# Altium PCB Copy of MT7688.PcbDoc
Units mil, origin at the board's own origin, x right, y up, seen from the top; angles counter-clockwise.
Board outline 3937.01 x 3937.01 mil, 4 copper layers (Top Layer, GND, Layer 3, Bottom Layer), stack 23.756 mil thick; 128 components, 123 nets, 502 pads, 1 vias.
Unrouted connection lines stored in the file: 341.
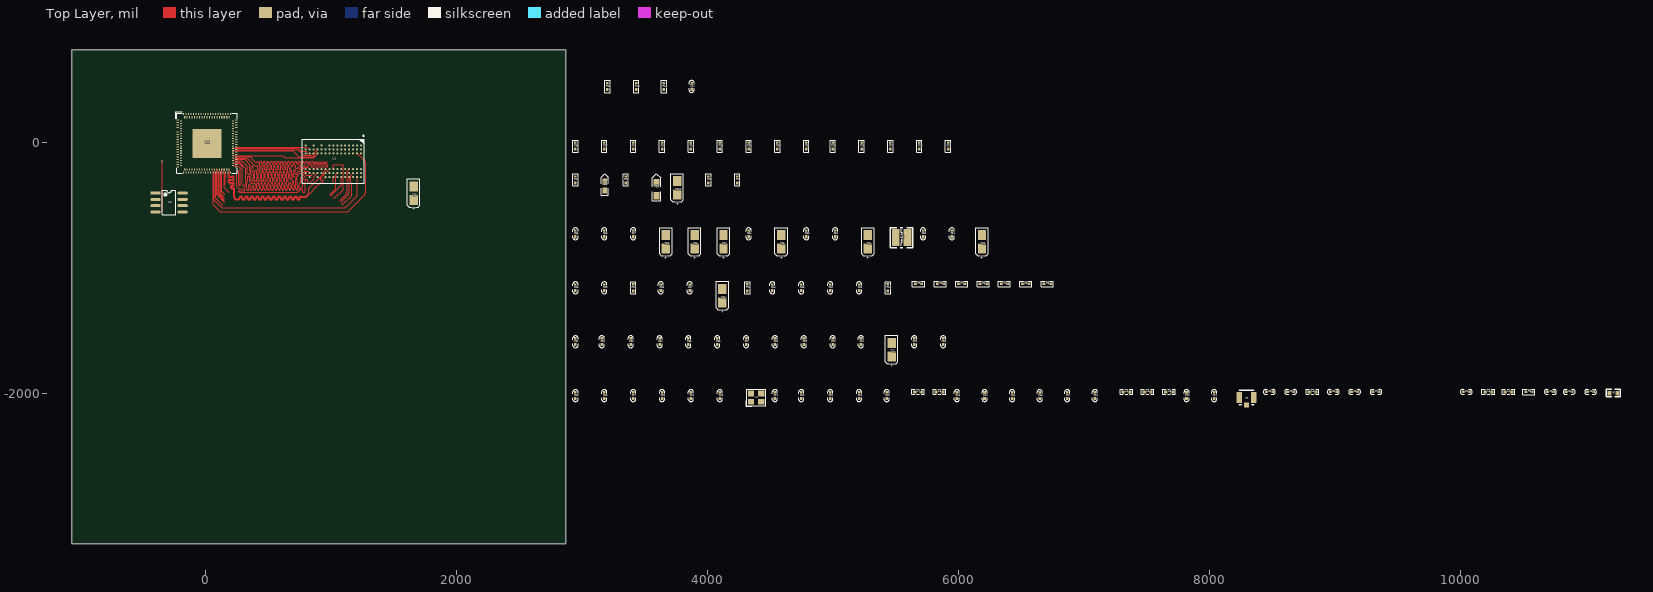
[diagram p0: Top Layer view]
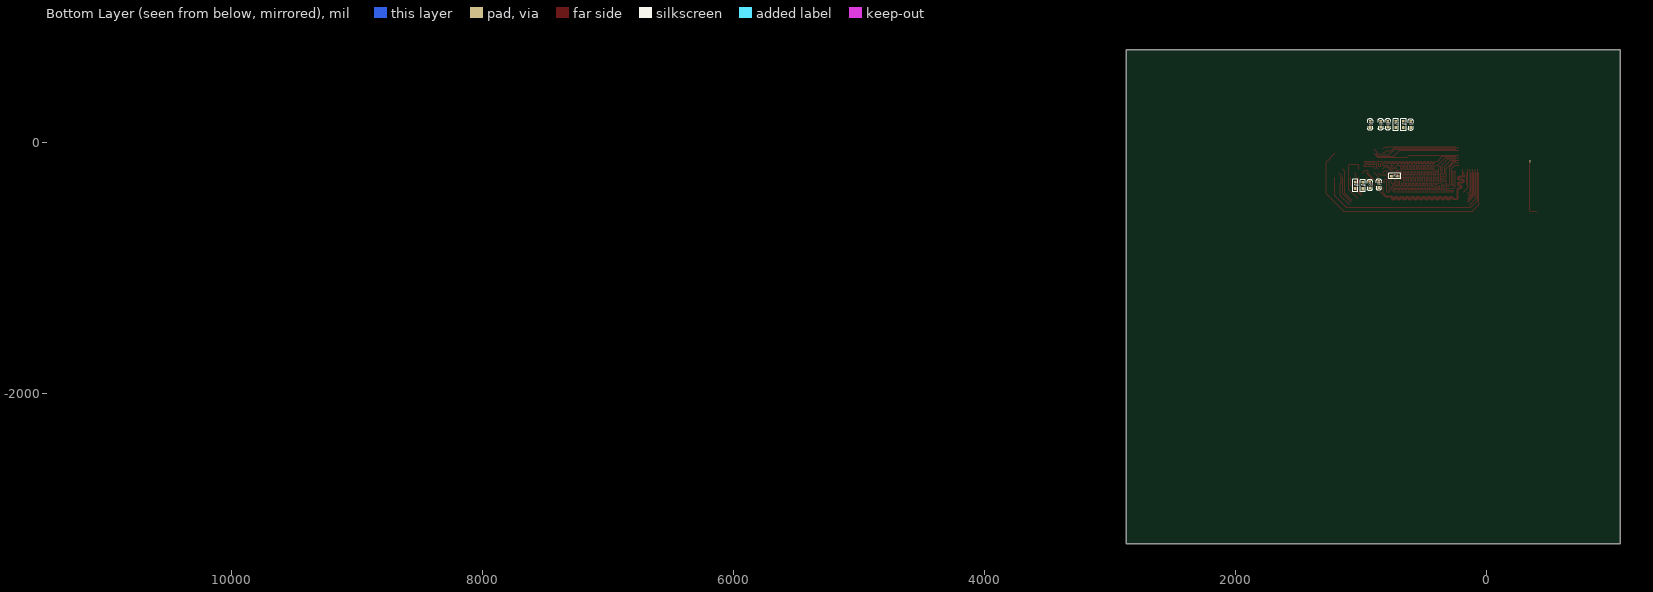
[diagram p1: Bottom Layer view, seen from below]

## Layer stack, top to bottom
Top Solder: solder mask 0.4, Solder Resist, Dk 3.5
Top Layer: signal copper 1.4
Dielectric 2: prepreg 2.8, PP-006, Dk 4.1
GND: signal copper 1.378
Dielectric 1: dielectric 12.6, FR-4, Dk 4.8
Layer 3: signal copper 1.378
Power: prepreg 2.8, PP-006, Dk 4.1
Bottom Layer: signal copper 1.4
Bottom Solder: solder mask 0.4, Solder Resist, Dk 3.5

## Board outline
-1069.88,-3198.88 2867.13,-3198.88 2867.13,738.13 -1069.88,738.13

## Design rules (kind name [scope] priority, off if disabled: settings)
Clearance DDR2 [InNetClass('DDR')] p1: gap=4 ignorepadtopadclearanceinfootprint=FALSE except(8: Arc-Arc Arc-Track Track-Track)
Clearance [All] p2: gap=6 ignorepadtopadclearanceinfootprint=FALSE except(4: Arc-Arc Arc-Track Arc-SMDPad Track-Track Track-SMDPad)
DiffPairsRouting [All] p1: maxlimit=16 minlimit=4 mostfreqgap=8 toplayer_prefgap=4 toplayer_minwidth=4 toplayer_maxwidth=8 toplayer_prefwidth=8 midlayer1_minwidth=4 midlayer1_maxwidth=8 midlayer1_prefwidth=8 midlayer2_mingap=8 midlayer2_minwidth=4 midlayer2_maxwidth=8 midlayer2_prefwidth=8 bottomlayer_minwidth=4 bottomlayer_maxwidth=8 bottomlayer_prefwidth=8 maxuncoupledlength=500
PolygonConnect [All] p1: connectstyle=Relief reliefconductorwidth=10 reliefentries=4 polygonreliefangle="90 Angle" airgapwidth=10
RoutingVias [All] p1: holewidth=9.84 width=17.72 viastyle="Through Hole" minholewidth=9.84 minwidth=17.72 maxholewidth=9.84 maxwidth=25.59
SilkToSolderMaskClearance [IsPad] p1: minsilkscreentomaskgap=5.91 clearancetoexposedcopper=TRUE
SolderMaskExpansion [IsVia] p1: expansion=4 istentingtop=TRUE
Width [All] p1: maxlimit=39.37 minlimit=4 preferedwidth=6
28 further rules are at their usual default settings.

## Classes and differential pairs
net class DDR: DDR_CASN DDR_CSN DDR_MBA0 DDR_MBA1 DDR_MBA2 DDR_MCKE DDR_MDQM0 DDR_MDQM1 DDR_MDQS0 DDR_MDQS1 DDR_MODT DDR_RASN DDR_VREF DDR_WEN MADDR0 MADDR1 MADDR2 MADDR3 MADDR4 MADDR5 MADDR6 MADDR7 MADDR8 MADDR9 MADDR10 MADDR11 MADDR12 MADDR13 MDATA0 MDATA1 MDATA2 MDATA3 MDATA4 MDATA5 MDATA6 MDATA7 MDATA8 MDATA9 MDATA10 MDATA11 MDATA12 MDATA13 MDATA14 MDATA15
component class Flash: C64 R18 R19 R20 U3
component class Designator: R25 R26 R27 R28 R29 R30 R31 R32 R33 R34 R35 R36 R37 R38
component class DDR: C58 C59 C60 C61 C62 C63 R13 R14 R15 R16 R17 TC9 U2
differential pair USB_D: +USB_D_P -USB_D_N
differential pair TXO1: +TXO1_P -TXO1_N
differential pair TXO0: +TXO0_P -TXO0_N
differential pair RXI1: +RXI1_P -RXI1_N
differential pair RXI0: +RXI0_P -RXI0_N
differential pair CLK: +CLK_P -CLK_N

## Components (designator, comment, footprint, x,y, rotation, side; value= is the part's Value field where it differs from the comment)
C1 "CAP" 0402C 10690.12,-1988.88 r0 top
C2 "CAP" 0402C 10840.12,-1988.88 r0 top
C3 "CAP" 0402C 11010.12,-1988.88 r0 top
C4 "CAP" 0402C 10020.12,-1988.88 r0 top
C5 "CAP" 0402C 8960.12,-1988.88 r0 top
C6 "CAP" 0402C 9130.12,-1988.88 r0 top
C7 "CAP" 0402C 9300.12,-1988.88 r0 top
C8 "CAP" 0402C 8450.12,-1988.88 r0 top
C9 "CAP" 0402C 8620.12,-1988.88 r0 top
C10 "CAP" 0402C 7815.12,-2043.88 r90 top
C11 "CAP" 0402C 8035.12,-2043.88 r90 top
C12 "CAP" 0402C 7085.12,-2043.88 r90 top
C13 "CAP" 0402C 5985.12,-2043.88 r90 top
C14 "CAP" 0402C 6205.12,-2043.88 r90 top
C15 "CAP" 0402C 6425.12,-2043.88 r90 top
C16 "CAP" 0402C 6645.12,-2043.88 r90 top
C17 "CAP" 0402C 6865.12,-2043.88 r90 top
C18 "CAP" 0402C 5205.12,-2043.88 r90 top
C19 "CAP" 0402C 5425.12,-2043.88 r90 top
C20 "CAP" 0402C 4975.12,-2043.88 r90 top
C21 "CAP" 0402C 4535.12,-2043.88 r90 top
C22 "CAP" 0402C 4745.12,-2043.88 r90 top
C23 "CAP" 0402C 4095.12,-2043.88 r90 top
C24 "CAP" 0402C 3865.12,-2043.88 r90 top
C25 "CAP" 0402C 3635.12,-2043.88 r90 top
C26 "CAP" 0402C 3175.12,-2043.88 r90 top
C27 "CAP" 0402C 3405.12,-2043.88 r90 top
C28 "CAP" 0402C 2945.12,-2043.88 r90 top
C29 "CAP" 0402C 5645.12,-1613.88 r90 top
C30 "CAP" 0402C 5875.12,-1613.88 r90 top
C31 "CAP" 0402C 2945.12,-1613.88 r90 top
C32 "CAP" 0402C 3155.12,-1613.88 r90 top
C33 "CAP" 0402C 3385.12,-1613.88 r90 top
C34 "CAP" 0402C 3615.12,-1613.88 r90 top
C35 "CAP" 0402C 3845.12,-1613.88 r90 top
C36 "CAP" 0402C 4075.12,-1613.88 r90 top
C37 "CAP" 0402C 4305.12,-1613.88 r90 top
C38 "CAP" 0402C 4535.12,-1613.88 r90 top
C39 "CAP" 0402C 4765.12,-1613.88 r90 top
C40 "CAP" 0402C 4995.12,-1613.88 r90 top
C41 "CAP" 0402C 5220.12,-1613.88 r90 top
C42 "CAP" 0402C 4975.12,-1183.88 r90 top
C43 "CAP" 0402C 5205.12,-1183.88 r90 top
C44 "CAP" 0402C 4515.12,-1183.88 r90 top
C45 "CAP" 0402C 4745.12,-1183.88 r90 top
C46 "CAP" 0402C 3625.12,-1183.88 r90 top
C47 "CAP" 0402C 3855.12,-1183.88 r90 top
C48 "CAP" 0402C 2945.12,-1183.88 r90 top
C49 "CAP" 0402C 3175.12,-1183.88 r90 top
C50 "0.1uF/16V" 0402C 5715.12,-753.88 r90 top
C51 "0.1uF/16V" 0402C 5945.12,-753.88 r90 top
C52 "0.1uF/16V" 0402C 5015.12,-753.88 r90 top
C53 "15pF/50V" 0402C 4785.12,-753.88 r90 top
C54 "15pF/50V" 0402C 4325.12,-753.88 r90 top
C55 "0.1uF/16V" 0402C 2945.12,-753.88 r90 top
C56 "0.1uF/16V" 0402C 3175.12,-753.88 r90 top
C57 "0.1uF/16V" 0402C 3405.12,-753.88 r90 top
C58 "0.1uF/16V" 0402C 601.53,167.03 r270 bottom
C59 "0.1uF/16V" 0402C 783.31,119.26 r90 bottom
C60 "0.1uF/16V" 0402C 924.06,118.02 r90 bottom
C61 "0.1uF/16V" 0402C 840.39,119.26 r90 bottom
C62 "0.1uF/16V" 0402C 855.63,-310.93 r270 bottom
C63 "0.1uF/16V" 0402C 926.5,-315.13 r270 bottom
C64 "0.1uF/16V" 0402C 3870.12,421.12 r90 top
D1 "LED" LED-0805B 3590.12,-423.88 r90 top
D2 "LED" LED-0603B 3180.12,-383.88 r90 top
L1 "INDUCTOR" 0402L 10195.12,-1988.88 r0 top
L2 "INDUCTOR" 0402L 10355.12,-1988.88 r0 top
L3 "INDUCTOR" 0402L 8795.12,-1988.88 r0 top
L4 "INDUCTOR" 0402L 7310.12,-1988.88 r0 top
L5 "INDUCTOR" 0402L 7480.12,-1988.88 r0 top
L6 "INDUCTOR" 0402L 7650.12,-1988.88 r0 top
L7 "INDUCTOR" 0402L 5650.12,-1988.88 r0 top
L8 "INDUCTOR" 0402L 5820.12,-1988.88 r0 top
L9 "INDUCTOR" CD31 5545.12,-758.88 r0 top
P1 "50OHM" IPEX 8235.12,-2033.88 r0 top
R1 "RES" 0603R 11185.12,-1998.88 r0 top
R2 "RES" 0402R 10520.12,-1988.88 r0 top
R3 "RES" 0402R 6680.12,-1128.88 r0 top
R4 "RES" 0402R 6340.12,-1128.88 r0 top
R5 "RES" 0402R 6510.12,-1128.88 r0 top
R6 "RES" 0402R 6170.12,-1128.88 r0 top
R7 "RES" 0402R 6000.12,-1128.88 r0 top
R8 "RES" 0402R 5830.12,-1128.88 r0 top
R9 "RES" 0402R 5655.12,-1128.88 r0 top
R10 "RES" 0402R 5435.12,-1183.88 r90 top
R11 "RES" 0402R 4315.12,-1183.88 r90 top
R12 "RES" 0402R 3405.12,-1183.88 r90 top
R13 "RES" 0402R 750.98,-268.76 r180 bottom
R14 "RES" 0402R 1041.5,-368.05 r90 bottom
R15 "RES" 0402R 983.43,-321.79 r270 bottom
R16 "RES" 0402R 658.03,165.82 r270 bottom
R17 "RES" 0402R 719.49,118.05 r90 bottom
R18 "RES" 0402R 3650.12,421.12 r90 top
R19 "RES" 0402R 3430.12,421.12 r90 top
R20 "RES" 0402R 3200.12,421.12 r90 top
R21 "RES" 0402R 4235.12,-323.88 r90 top
R22 "RES" 0402R 4005.12,-323.88 r90 top
R23 "RES" 0402R 3345.12,-323.88 r90 top
R24 "RES" 0402R 2945.12,-323.88 r90 top
R25 "RES" 0402R 5915.12,-53.88 r90 top
R26 "RES" 0402R 5685.12,-53.88 r90 top
R27 "RES" 0402R 5455.12,-53.88 r90 top
R28 "RES" 0402R 5225.12,-53.88 r90 top
R29 "RES" 0402R 4995.12,-53.88 r90 top
R30 "RES" 0402R 4555.12,-53.88 r90 top
R31 "RES" 0402R 4785.12,-53.88 r90 top
R32 "RES" 0402R 4325.12,-53.88 r90 top
R33 "RES" 0402R 4095.12,-53.88 r90 top
R34 "RES" 0402R 3865.12,-53.88 r90 top
R35 "RES" 0402R 3635.12,-53.88 r90 top
R36 "RES" 0402R 3405.12,-53.88 r90 top
R37 "RES" 0402R 3175.12,-53.88 r90 top
R38 "RES" 0402R 2945.12,-53.88 r90 top
TC1 "TCAP" TAJ-A/3216 5465.12,-1708.88 r90 top
TC2 "TCAP" TAJ-A/3216 4115.12,-1278.88 r90 top
TC3 "2.2uF/6.3V" TAJ-A/3216 6185.12,-848.88 r90 top
TC4 "10uF/6.3V" TAJ-A/3216 5275.12,-848.88 r90 top
TC5 "10uF/6.3V" TAJ-A/3216 4585.12,-848.88 r90 top
TC6 "2.2uF/6.3V" TAJ-A/3216 3895.12,-848.88 r90 top
TC7 "4.7uF/6.3V" TAJ-A/3216 4125.12,-848.88 r90 top
TC8 "4.7uF/6.3V" TAJ-A/3216 3665.12,-848.88 r90 top
TC9 "4.7uF/6.3V" TAJ-A/3216 1655.8,-462.05 r90 top
TC10 "4.7uF/6.3V" TAJ-A/3216 3755.12,-418.88 r90 top
U1 "MT7688AN" MT7628AN$2F$DRQFN156$2F$SMD$2F$P0.5$2F$12X12 7.87,-7.87 r270 top locked
U2 "DDR2_W9751G6KB" MICT-RT-84 1015.39,-150.79 r270 top locked
U3 "W25Q128" SOP8 -402.56,-404.98 r0 top
X1 "XTAL-4P" "OSC 3225-4P" 4385.12,-2033.88 r0 top

## Footprints (in the part's own frame and the unit in brackets; to place one, negate y for a bottom-side part, rotate by r counter-clockwise, add the part's x,y. Pads: shape width x height; smd on the part's side, far side on the other; paste and mask are expansions set on the pad)
0402C [mil]
  rect 25x20 smd: 1(2,0.16) 2(48,0.16)
  silkscreen extent -23,-20 73,20, body extent 5,-12 45,12, height 8
0402L [mil]
  rect 30x25 smd: 1(0,0) 2(50,0)
  silkscreen extent -25,-20 75,20, body extent 5,-10 45,10, height 20
0402R [mil]
  rect 26x20 smd: 1(0,0) 2(48,0)
  silkscreen extent -24,-21 72,21, body extent 4,-10 43,10, height 13
0603R [mm]
  rect 0.8x0.965 smd: 1(0,0) 2(1.6,0)
  silkscreen extent -0.64,-0.76 2.21,0.76, body extent -0.04,-0.41 1.56,0.41, height 0.45
CD31 [mm] "3.5*3*1mm（长宽高）"
  rect 1.6x3.5 smd: 1(-1.2,0) 2(1.2,0)
  silkscreen extent -2.29,-2.03 2.29,2.03, body extent -1.72,-1.48 1.72,1.52, height 1.2
IPEX [mm]
  rect 1.05x2.2 smd: 1(0,0) 3(2.95,0)
  rect 1x1.05 smd: 2(1.475,-1.525)
  silkscreen extent -0.02,-1.5 2.98,1.5, body extent 0.02,-1.55 3.02,1.55, height 1.25
LED-0603B [mil]
  rect 50x35 smd: A(0,0.26) K(70,0.26)
  silkscreen extent -36,-28 135,28, body extent 4,-15 66,17, height 24
LED-0805B [mil]
  rect 60x50 smd: A(0,0) K(100,0)
  silkscreen extent -40,-35 175,35, body extent 10,-25 89,25, height 32
MICT-RT-84 [mm] "BGA, 84-Balls, Body 12.5x9mm, Pitch 0.8mm"
  round 0.4 smd: A1(-3.2,5.6) A2(-2.4,5.6) A3(-1.6,5.6) A7(1.6,5.6) A8(2.4,5.6) A9(3.2,5.6) B1(-3.2,4.8) B2(-2.4,4.8) B3(-1.6,4.8) B7(1.6,4.8) B8(2.4,4.8) B9(3.2,4.8) C1(-3.2,4) C2(-2.4,4) C3(-1.6,4) C7(1.6,4) C8(2.4,4) C9(3.2,4) D1(-3.2,3.2) D2(-2.4,3.2) D3(-1.6,3.2) D7(1.6,3.2) D8(2.4,3.2) D9(3.2,3.2) E1(-3.2,2.4) E2(-2.4,2.4) E3(-1.6,2.4) E7(1.6,2.4) E8(2.4,2.4) E9(3.2,2.4) F1(-3.2,1.6) F2(-2.4,1.6) F3(-1.6,1.6) F7(1.6,1.6) F8(2.4,1.6) F9(3.2,1.6) G1(-3.2,0.8) G2(-2.4,0.8) G3(-1.6,0.8) G7(1.6,0.8) G8(2.4,0.8) G9(3.2,0.8) H1(-3.2,0) H2(-2.4,0) H3(-1.6,0) H7(1.6,0) H8(2.4,0) H9(3.2,0) J1(-3.2,-0.8) J2(-2.4,-0.8) J3(-1.6,-0.8) J7(1.6,-0.8) J8(2.4,-0.8) J9(3.2,-0.8) K2(-2.4,-1.6) K3(-1.6,-1.6) K7(1.6,-1.6) K8(2.4,-1.6) K9(3.2,-1.6) L1(-3.2,-2.4) L2(-2.4,-2.4) L3(-1.6,-2.4) L7(1.6,-2.4) L8(2.4,-2.4) M2(-2.4,-3.2) M3(-1.6,-3.2) M7(1.6,-3.2) M8(2.4,-3.2) M9(3.2,-3.2) N1(-3.2,-4) N2(-2.4,-4) N3(-1.6,-4) N7(1.6,-4) N8(2.4,-4) P2(-2.4,-4.8) P3(-1.6,-4.8) P7(1.6,-4.8) P8(2.4,-4.8) P9(3.2,-4.8) R1(-3.2,-5.6) R2(-2.4,-5.6) R3(-1.6,-5.6) R7(1.6,-5.6) R8(2.4,-5.6)
  silkscreen extent -5.27,-6.25 4.5,6.25, body extent -4.5,-6.25 4.5,6.25, height 1.2
MT7628AN$2F$DRQFN156$2F$SMD$2F$P0.5$2F$12X12 [mm]
  rect 0.19x0.45 smd: 1(-4.75,-5.925) 3(-4.25,-5.925) 5(-3.75,-5.925) 7(-3.25,-5.925) 9(-2.75,-5.925) 11(-2.25,-5.925) 13(-1.75,-5.925) 15(-1.25,-5.925) 17(-0.75,-5.925) 19(-0.25,-5.925) 21(0.25,-5.925) 23(0.75,-5.925) 25(1.25,-5.925) 27(1.75,-5.925) 29(2.25,-5.925) 31(2.75,-5.925) 33(3.25,-5.925) 35(3.75,-5.925) 37(4.25,-5.925) 39(4.75,-5.925) 79(4.75,5.925) 81(4.25,5.925) 83(3.75,5.925) 85(3.25,5.925) 87(2.75,5.925) 89(2.25,5.925) 91(1.75,5.925) 93(1.25,5.925) 95(0.75,5.925) 97(0.25,5.925) 99(-0.25,5.925) 101(-0.75,5.925) 103(-1.25,5.925) 105(-1.75,5.925) 107(-2.25,5.925) 109(-2.75,5.925) 111(-3.25,5.925) 113(-3.75,5.925) 115(-4.25,5.925) 117(-4.75,5.925)
  rect 0.22x0.45 smd: 2(-4.5,-5.275) 4(-4,-5.275) 6(-3.5,-5.275) 8(-3,-5.275) 10(-2.5,-5.275) 12(-2,-5.275) 14(-1.5,-5.275) 16(-1,-5.275) 18(-0.5,-5.275) 20(0,-5.275) 22(0.5,-5.275) 24(1,-5.275) 26(1.5,-5.275) 28(2,-5.275) 30(2.5,-5.275) 32(3,-5.275) 34(3.5,-5.275) 36(4,-5.275) 38(4.5,-5.275) 80(4.5,5.275) 82(4,5.275) 84(3.5,5.275) 86(3,5.275) 88(2.5,5.275) 90(2,5.275) 92(1.5,5.275) 94(1,5.275) 96(0.5,5.275) 98(0,5.275) 100(-0.5,5.275) 102(-1,5.275) 104(-1.5,5.275) 106(-2,5.275) 108(-2.5,5.275) 110(-3,5.275) 112(-3.5,5.275) 114(-4,5.275) 116(-4.5,5.275)
  rect 0.45x0.19 smd: 40(5.925,-4.75) 42(5.925,-4.25) 44(5.925,-3.75) 46(5.925,-3.25) 48(5.925,-2.75) 50(5.925,-2.25) 52(5.925,-1.75) 54(5.925,-1.25) 56(5.925,-0.75) 58(5.925,-0.25) 60(5.925,0.25) 62(5.925,0.75) 64(5.925,1.25) 66(5.925,1.75) 68(5.925,2.25) 70(5.925,2.75) 72(5.925,3.25) 74(5.925,3.75) 76(5.925,4.25) 78(5.925,4.75) 118(-5.925,4.75) 120(-5.925,4.25) 122(-5.925,3.75) 124(-5.925,3.25) 126(-5.925,2.75) 128(-5.925,2.25) 130(-5.925,1.75) 132(-5.925,1.25) 134(-5.925,0.75) 136(-5.925,0.25) 138(-5.925,-0.25) 140(-5.925,-0.75) 142(-5.925,-1.25) 144(-5.925,-1.75) 146(-5.925,-2.25) 148(-5.925,-2.75) 150(-5.925,-3.25) 152(-5.925,-3.75) 154(-5.925,-4.25) 156(-5.925,-4.75)
  rect 0.45x0.22 smd: 41(5.275,-4.5) 43(5.275,-4) 45(5.275,-3.5) 47(5.275,-3) 49(5.275,-2.5) 51(5.275,-2) 53(5.275,-1.5) 55(5.275,-1) 57(5.275,-0.5) 59(5.275,0) 61(5.275,0.5) 63(5.275,1) 65(5.275,1.5) 67(5.275,2) 69(5.275,2.5) 71(5.275,3) 73(5.275,3.5) 75(5.275,4) 77(5.275,4.5) 119(-5.275,4.5) 121(-5.275,4) 123(-5.275,3.5) 125(-5.275,3) 127(-5.275,2.5) 129(-5.275,2) 131(-5.275,1.5) 133(-5.275,1) 135(-5.275,0.5) 137(-5.275,0) 139(-5.275,-0.5) 141(-5.275,-1) 143(-5.275,-1.5) 145(-5.275,-2) 147(-5.275,-2.5) 149(-5.275,-3) 151(-5.275,-3.5) 153(-5.275,-4) 155(-5.275,-4.5)
  rect 5.9x5.9 smd: 157(0,0)
  silkscreen extent -6.35,-6.35 6.1,6.1
"OSC 3225-4P" [mm]
  rect 1.3x1.2 smd: 1(-1.05,-0.85) 2(1.05,-0.85) 3(1.05,0.85) 4(-1.05,0.85)
  silkscreen extent -2.03,-1.75 1.91,1.65, body extent -1.47,-1.27 1.73,1.23, height 0.7
SOP8 [mm]
  rect 2.1x0.6 smd: 1(0,0)
  oval 2.1x0.6 smd: 2(0,-1.27) 3(0,-2.54) 4(0,-3.81) 5(5.5,-3.81) 6(5.5,-2.54) 7(5.5,-1.27) 8(5.5,0)
  silkscreen extent 1.35,-4.41 4.15,0.6, body extent -0.36,-4.37 5.64,0.63, height 1.9
TAJ-A/3216 [mm]
  rect 2x1.7 smd: 1(0.047,0) 2(2.794,0)
  silkscreen extent -1.4,-1.27 4.32,1.27, body extent -0.2,-0.8 3,0.8, height 1.6

## Part data
C1 C2 C3 C4 C5 C6 C7 C8 C9 C10 C11 C12 C13 C14 C15 C16 C17 C18 C19 C20 C21 C22 C23 C24 C25 C26 C27 C28 C29 C30 C31 C32 C33 C34 C35 C36 C37 C38 C39 C40 C41 C42 C43 C44 C45 C46 C47 C48 C49: "无极性电容"
C50 C51 C52 C53 C54 C55 C56 C57 C58 C59 C60 C61 C62 C63 C64: library part CAP, "无极性电容"
P1: library part IPEX, "RF Coaxial PCB Connector, MCX; Thru-Hole, Right-Angle Mount Socket, Blunt Post Terminal, 50 Ohm Impedance", PackageDocument=04-Jul-1999, ComponentLink1Description="Manufacturer Link", ComponentLink1URL=http://www.amphenolrf.com/, DatasheetDocument=30-May-2003, DrillSize="Corresponds to nominal value.", LatestRevisionDate=15-Jul-2004, LatestRevisionNote="Component Replaced.", PackageReference=919-119J-51AX, PCB_Layout="Complies with manufacturer's recommendation.", Published=15-Jul-2004, Publisher="Altium Limited"
TC1 TC2: "钽电容"
TC3 TC4 TC5 TC6 TC7 TC8 TC9 TC10: library part TCAP, "钽电容"
X1: "4脚无源晶振"

## Via types
v1: diameter 17.72, hole 9.84, Top Layer to Bottom Layer, tented both sides, 1 vias

## Nets (pads, with @x,y where several pads share a name; then routed paths per layer and width w, separated by ;. In a path a pad name is that pad's centre, name@x,y a point inside that pad or via, vN(x,y) a via of type N, cw(c..) or ccw(c..) an arc to the next point about the centre after c; other vN are vias at no path point)
3.3V_RF: C4.1 C5.2 C6.2 C7.2 C8.2 C9.2 C21.2 C22.2 C24.1 C25.1 C26.1 C27.1 L1.2 L2.2 R1.2 R2.1 U1.8 U1.14 U1.15 U1.149 U1.150 U1.155
3.3VD: C1.2 C2.2 C3.2 C44.1 C45.1 C46.1 C47.1 C49.1 C50.1 C51.1 R1.1 R4.2 R5.2 R21.1 R23.2 R24.2 R25.1 R27.1 R29.1 R30.1 R33.1 R35.1 R37.1 TC2.1 TC3.1 TC5.1 U1.23 U1.32 U1.38 U1.41 U1.53 U1.60 U1.117 U1.123 U1.124 U1.134 U1.146
CLK: R3.2 R27.2 R28.2 U3.6
CLK_N: R13.2 U1.76 U2.K8 | length 1517.6
  Top Layer w4: U1.76 175.58,-241.52 cw(c172.75,-244.35) 176.75,-244.35 176.75,-254.24 cw(c172.75,-254.24) 175.58,-257.07 169.2,-263.45 169.2,-274.15 174,-278.95 211.05,-278.95 cw(c211.05,-286.6) 218.7,-286.6 218.7,-287.3 cw(c211.65,-287.3) 211.65,-294.35 189.6,-294.35 ccw(c189.6,-308.9) 175.05,-308.9 ccw(c190.8,-308.9) 190.8,-324.65 212.45,-324.65 cw(c212.45,-330.95) 218.75,-330.95 218.75,-332.4 cw(c211.09,-332.4) 211.09,-340.06 205.64,-340.06 ccw(c205.64,-353.75) 191.95,-353.75 191.95,-355.15 ccw(c206.66,-355.15) 206.66,-369.86 214.16,-369.86 cw(c214.16,-377.38) 221.68,-377.38 221.68,-437.63 ccw(c240.8,-437.63) 240.8,-456.75 259.05,-456.75 ccw(c259.05,-444.7) 271.1,-444.7 cw(c278.05,-444.7) 285,-444.7 ccw(c299.95,-444.7) 314.9,-444.7 cw(c321.85,-444.7) 328.8,-444.7 ccw(c343.75,-444.7) 358.7,-444.7 cw(c365.65,-444.7) 372.6,-444.7 ccw(c387.55,-444.7) 402.5,-444.7 cw(c409.45,-444.7) 416.4,-444.7 ccw(c431.35,-444.7) 446.3,-444.7 cw(c453.25,-444.7) 460.2,-444.7 ccw(c475.15,-444.7) 490.1,-444.7 cw(c497.05,-444.7) 504,-444.7 ccw(c518.95,-444.7) 533.9,-444.7 cw(c540.85,-444.7) 547.8,-444.7 ccw(c562.75,-444.7) 577.7,-444.7 cw(c584.65,-444.7) 591.6,-444.7 ccw(c606.55,-444.7) 621.5,-444.7 cw(c628.45,-444.7) 635.4,-444.7 ccw(c650.35,-444.7) 665.3,-444.7 cw(c672.25,-444.7) 679.2,-444.7 ccw(c694.15,-444.7) 709.1,-444.7 cw(c716.05,-444.7) 723,-444.7 ccw(c737.95,-444.7) 752.41,-448.51 752.41,-440.8 cw(c756.41,-440.8) 756.44,-436.8 797.09,-436.8 ccw(c797.09,-432.8) 799.92,-435.63 911.93,-323.62 cw(c916.01,-327.75) 916.01,-321.94 931.35,-321.94 ccw(c931.35,-317.94) 935.35,-317.94 935.35,-306.33 ccw(c931.35,-306.3) 931.35,-302.3 918.65,-302.3 cw(c918.65,-298.3) 914.65,-298.3 914.65,-285.21 cw(c918.65,-285.21) 915.82,-282.38 951.48,-246.72 ccw(c948.65,-243.9) 952.26,-245.61 U2.K8
CLK_P: R13.1 U1.77 U2.J8 | length 1531.6
  Top Layer w4: U1.77 185.04,-229.11 ccw(c189.04,-229.11) 185.05,-229.4 185.13,-230.49 cw(c181.14,-230.8) 185.14,-230.8 185.14,-255.9 184.95,-256.1 184.95,-263.9 ccw(c192,-263.9) 192,-270.95 211.05,-270.95 cw(c211.05,-286.6) 226.7,-286.6 226.7,-287.3 cw(c211.65,-287.3) 211.65,-302.35 189.6,-302.35 ccw(c189.6,-308.9) 183.05,-308.9 ccw(c190.8,-308.9) 190.8,-316.65 212.45,-316.65 cw(c212.45,-330.95) 226.75,-330.95 226.75,-332.4 cw(c211.09,-332.4) 211.09,-348.06 205.64,-348.06 ccw(c205.64,-353.75) 199.95,-353.75 199.95,-355.15 ccw(c206.66,-355.15) 206.66,-361.86 214.16,-361.86 cw(c214.16,-377.5) 229.8,-377.5 229.8,-437.75 ccw(c240.8,-437.75) 240.8,-448.75 259.05,-448.75 ccw(c259.05,-444.7) 263.1,-444.7 cw(c278.05,-444.7) 293,-444.7 ccw(c299.95,-444.7) 306.9,-444.7 cw(c321.85,-444.7) 336.8,-444.7 ccw(c343.75,-444.7) 350.7,-444.7 cw(c365.65,-444.7) 380.6,-444.7 ccw(c387.55,-444.7) 394.5,-444.7 cw(c409.45,-444.7) 424.4,-444.7 ccw(c431.35,-444.7) 438.3,-444.7 cw(c453.25,-444.7) 468.2,-444.7 ccw(c475.15,-444.7) 482.1,-444.7 cw(c497.05,-444.7) 512,-444.7 ccw(c518.95,-444.7) 525.9,-444.7 cw(c540.85,-444.7) 555.8,-444.7 ccw(c562.75,-444.7) 569.7,-444.7 cw(c584.65,-444.7) 599.6,-444.7 ccw(c606.55,-444.7) 613.5,-444.7 cw(c628.45,-444.7) 643.4,-444.7 ccw(c650.35,-444.7) 657.3,-444.7 cw(c672.25,-444.7) 687.2,-444.7 ccw(c694.15,-444.7) 701.1,-444.7 cw(c716.05,-444.7) 731,-444.7 ccw(c737.95,-444.7) 744.41,-447.27 744.41,-437.23 744.41,-437.18 cw(c752.4,-437.19) 746.74,-431.55 cw(c753.36,-438.15) 753.35,-428.8 790.74,-428.8 ccw(c790.74,-424.8) 793.57,-427.63 817.08,-404.12 ccw(c814.25,-401.29) 818.25,-401.29 818.25,-369.77 cw(c822.25,-369.77) 819.42,-366.94 936.83,-249.54 ccw(c934,-246.71) 938,-246.71 938,-232.05 942,-228.05 967.14,-228.05 cw(c967.14,-232.05) 969.99,-229.24 982.71,-241.96 cw(c979.9,-244.8) 983.9,-244.8 U2.J8
CPURST_N: R22.2 U1.138
CS0: R18.2 U1.28 U3.1
DDR_1V8: C52.1 C53.2 C54.1 C55.1 C56.1 C57.1 C58.1 C60.1 C61.1 C62.1 C63.1 L9.2 R14.1 R16.1 TC4.1 TC8.1 TC9.1 U1.22 U1.58 U1.89 U1.91 U1.122 U1.145 U2.A1 U2.A9 U2.C1 U2.C3 U2.C7 U2.C9 U2.E1 U2.E9 U2.G1 U2.G3 U2.G7 U2.G9 U2.J1 U2.J9 U2.M9 U2.R1
DDR_CASN: U1.75 U2.L7
DDR_CSN: U1.78 U2.L8
DDR_IO_1V8: TC6.1 TC7.1 U1.79 U1.98 U1.116 U1.125
DDR_IO_1V8_MT7688: C31.1 C32.1 C33.1 C34.1 C35.1 C36.1 C37.1 C38.1 C39.1 C40.1 C41.1 TC1.1
DDR_MBA0: U1.100 U2.L2
DDR_MBA1: U1.99 U2.L3
DDR_MBA2: U1.101 U2.L1
DDR_MCKE: U1.103 U2.K2
DDR_MDQM0: U1.108 U2.F3
DDR_MDQM1: U1.64 U2.B3 | length 1905.3
  Top Layer w4: U1.64 57.09,-495.18 ccw(c61.09,-495.18) 58.26,-498.01 110.68,-550.43 ; 110.7,-550.45 ccw(c113.51,-547.6) 113.51,-551.6 1132.57,-551.6 ccw(c1132.54,-547.6) 1135.37,-550.43 1274.4,-411.4 1274.4,-157.83 U2.B3@1204.75,-88.18
DDR_MDQS0: U1.113 U2.F7
DDR_MDQS1: U1.72 U2.B7
DDR_MODT: R14.2 R15.1 U1.74 U2.K9 | length 110.1
  Top Layer w4: 155.51,-338.16 U1.74 ; 949.62,-289.53 952.28,-278.6 ccw(c948.4,-277.63) 952.4,-277.7 U2.K9
DDR_RASN: U1.81 U2.K7
DDR_VREF: C29.1 C30.1 C58.2 C59.1 R16.2 R17.1 U1.90 U1.104 U2.J2
DDR_WEN: U1.102 U2.K3
EPH_LED0_N: U1.143
EPH_LED1_N: U1.142
Flash_3V3: C64.1 R18.1 R19.1 R20.2 U3.8
GN1: C1.1 C2.1 C3.1 C4.2 C5.1 C6.1 C7.1 C8.1 C9.1 C12.1 C13.1 C14.1 C15.2 C18.2 C19.2 C20.2 C21.1 C22.1 C23.1 C24.2 C25.2 C26.2 C27.2 C28.2 C29.2 C30.2 C31.2 C32.2 C33.2 C34.2 C35.2 C36.2 C37.2 C38.2 C39.2 C40.2 C41.2 C42.2 C43.2 C44.2 C45.2 C46.2 C47.2 C48.2 C49.2 C50.2 C51.2 C52.2 C53.1 C54.2 C55.2 C56.2 C57.2 D2.K L3.2 P1.1 P1.3 R6.1 R9.1 R10.1 R11.1 R12.1 R26.1 R28.1 R31.1 R32.1 R34.1 R36.1 R38.1 TC1.2 TC2.2 TC3.2 TC4.2 TC5.2 TC6.2 TC7.2 TC8.2 TC10.2 U1.1 U1.2 U1.7 U1.10 U1.13 U1.63 U1.115 U1.120 U1.121 U1.128 U1.152 U1.156 U1.157 X1.1 X1.2 X1.4
GND: C59.2 C60.2 C61.2 C62.2 C63.2 C64.2 R15.2 R17.2 TC9.2 U2.A3 U2.A7 U2.B2 U2.B8 U2.D2 U2.D8 U2.E3 U2.E7 U2.F2 U2.F8 U2.H2 U2.H8 U2.J3 U2.J7 U2.N1 U2.P9 U3.4 | length 450.9
  Top Layer w6: U3.4 -359.88,-554.98 -349.88,-544.98 v1(-349.88,-150.88)
GPIO_0: U1.29
I2C_SCLK: R5.1 U1.20
I2C_SD: R4.1 U1.21
I2S_CLK: U1.19
I2S_DI: U1.16
I2S_DO: R37.2 R38.2 U1.17
I2S_WS: U1.18
MADDR0: U1.80 U2.M8 | length 1450.9
  Top Layer w4: U1.80 252.79,-185.04 272.78,-205.03 cw(c269.95,-207.86) 273.95,-207.83 273.95,-343.79 cw(c269.95,-343.79) 267.12,-346.62 260.57,-340.07 cw(c263.4,-337.24) 259.4,-337.24 259.4,-232.43 ccw(c255.4,-232.4) 255.4,-228.4 248.55,-228.4 ccw(c248.55,-232.4) 244.55,-232.4 244.55,-348.19 ccw(c248.55,-348.19) 245.72,-351.02 262.85,-368.15 310.8,-368.15 313.15,-370.5 313.15,-381.2 310.55,-383.8 261.79,-383.8 259.45,-386.14 259.45,-395.55 263.6,-399.7 727.39,-399.7 ccw(c727.39,-395.7) 730.22,-398.53 748.74,-380.01 ccw(c745.92,-377.18) 749.52,-378.92 749.85,-378.24 cw(c753.85,-378.2) 749.88,-377.69 cw(c753.85,-378.2) 753.88,-374.2 768.55,-374.2 cw(c768.55,-378.2) 772.55,-378.2 772.55,-394.85 ccw(c776.55,-394.85) 776.55,-398.85 786.85,-398.85 ccw(c786.85,-394.85) 790.85,-394.85 790.85,-298.9 cw(c794.85,-298.9) 794.85,-294.9 806.3,-294.9 cw(c806.3,-298.9) 810.3,-298.9 810.3,-316.9 ccw(c814.3,-316.9) 814.3,-320.9 829.34,-320.9 ccw(c829.34,-316.9) 832.17,-319.73 857.33,-294.57 ccw(c854.5,-291.74) 858.5,-291.74 858.5,-274.55 888.7,-244.35 U2.M8@889.7,-244.35
MADDR1: U1.88 U2.M3 | length 700.3
  Top Layer w4: U1.88 614.85,-106.3 633.2,-124.65 858.73,-124.65 880.79,-102.59 880.79,-98.8 889.41,-90.18 U2.M3
MADDR2: U1.87 U2.M7 | length 1450.6
  Top Layer w4: U1.87 353.1,-116.14 389.96,-153 392.1,-153 408.1,-153 cw(c408.1,-160) 415.1,-160 415.1,-165.61 ccw(c422.1,-165.61) 429.1,-165.61 429.1,-159.44 cw(c436.1,-159.44) 443.1,-159.44 443.1,-165.61 ccw(c450.1,-165.61) 457.1,-165.61 457.1,-159.44 cw(c464.1,-159.44) 471.1,-159.44 471.1,-165.61 ccw(c478.1,-165.61) 485.1,-165.61 485.1,-159.44 cw(c492.1,-159.44) 499.1,-159.44 499.1,-165.61 ccw(c506.1,-165.61) 513.1,-165.61 513.1,-159.44 cw(c520.1,-159.44) 527.1,-159.44 527.1,-165.61 ccw(c534.1,-165.61) 541.1,-165.61 541.1,-159.44 cw(c548.1,-159.44) 555.1,-159.44 555.1,-165.61 ccw(c562.1,-165.61) 569.1,-165.61 569.1,-159.44 cw(c576.1,-159.44) 583.1,-159.44 583.1,-165.61 ccw(c590.1,-165.61) 597.1,-165.61 597.1,-159.44 cw(c604.1,-159.44) 611.1,-159.44 611.1,-165.61 ccw(c618.1,-165.61) 625.1,-165.61 625.1,-159.44 cw(c632.1,-159.44) 639.1,-159.44 639.1,-165.61 ccw(c646.1,-165.61) 653.1,-165.61 653.1,-159.44 cw(c660.1,-159.44) 667.1,-159.44 667.1,-165.61 ccw(c674.1,-165.61) 681.1,-165.61 681.1,-159.44 cw(c688.1,-159.44) 695.1,-159.44 695.1,-165.61 ccw(c702.1,-165.61) 709.1,-165.61 709.1,-159.44 cw(c716.1,-159.44) 723.1,-159.44 723.1,-165.61 ccw(c730.1,-165.61) 737.1,-165.61 737.1,-159.44 cw(c744.1,-159.44) 751.1,-159.44 751.1,-165.61 ccw(c758.1,-165.61) 765.1,-165.61 765.1,-159.44 cw(c772.1,-159.44) 779.1,-159.44 779.1,-162.82 ccw(c786.1,-162.82) 793.1,-162.82 793.1,-159.44 cw(c800.1,-159.44) 807.1,-159.44 807.1,-160 ccw(c814.1,-160) 821.1,-160 cw(c828.1,-160) 828.1,-153 837.45,-153 963.46,-153 965.8,-155.34 965.8,-164.16 963.46,-166.5 886.59,-166.5 884.25,-168.84 884.25,-177.56 886.59,-179.9 969.19,-179.9 971.53,-182.24 971.53,-191.01 969.19,-193.35 892.03,-193.35 887.42,-197.96 887.42,-211.8 U2.M7
MADDR3: U1.97 U2.N2
MADDR4: U1.82 U2.N8 | length 1449.5
  Top Layer w4: U1.82 259.98,-165.35 272.29,-177.66 ; 272.35,-177.6 287.85,-193.1 287.85,-338.95 296.24,-347.34 300.29,-351.39 ccw(c305.24,-346.44) 312.24,-346.44 312.24,-334 cw(c319.24,-334) 326.24,-334 326.24,-374.46 ccw(c333.24,-374.46) 340.24,-374.46 340.24,-343.39 cw(c347.24,-343.39) 354.24,-343.39 354.24,-374.46 ccw(c361.24,-374.46) 368.24,-374.46 368.24,-351.52 cw(c375.24,-351.52) 382.24,-351.52 382.24,-374.46 ccw(c389.24,-374.46) 396.24,-374.46 396.24,-361.4 cw(c403.24,-361.4) 410.24,-361.4 410.24,-374.46 ccw(c417.24,-374.46) 424.24,-374.46 424.24,-368.79 cw(c431.24,-368.79) 438.24,-368.79 438.24,-374.46 ccw(c445.24,-374.46) 452.24,-374.46 452.24,-368.79 cw(c459.24,-368.79) 466.24,-368.79 466.24,-374.46 ccw(c473.24,-374.46) 480.24,-374.46 480.24,-368.79 cw(c487.24,-368.79) 494.24,-368.79 494.24,-374.46 ccw(c501.24,-374.46) 508.24,-374.46 508.24,-368.79 cw(c515.24,-368.79) 522.24,-368.79 522.24,-374.46 ccw(c529.24,-374.46) 536.24,-374.46 536.24,-368.79 cw(c543.24,-368.79) 550.24,-368.79 550.24,-374.46 ccw(c557.24,-374.46) 564.24,-374.46 564.24,-368.79 cw(c571.24,-368.79) 578.24,-368.79 578.24,-374.46 ccw(c585.24,-374.46) 592.24,-374.46 592.24,-368.79 cw(c599.24,-368.79) 606.24,-368.79 606.24,-374.46 ccw(c613.24,-374.46) 620.24,-374.46 620.24,-368.79 cw(c627.24,-368.79) 634.24,-368.79 634.24,-374.46 ccw(c641.24,-374.46) 648.24,-374.46 648.24,-368.79 cw(c655.24,-368.79) 662.24,-368.79 662.24,-374.46 ccw(c669.24,-374.46) 676.24,-374.46 676.24,-368.79 cw(c683.24,-368.79) 690.24,-368.79 690.24,-374.46 ccw(c697.24,-374.46) 704.24,-374.46 704.24,-368.79 cw(c711.24,-368.79) 718.24,-368.79 718.24,-373.63 ccw(c725.24,-373.63) 732.24,-373.63 732.24,-368.79 cw(c739.24,-368.79) 739.24,-361.79 757.86,-361.79 769.3,-350.35 769.8,-349.85 769.8,-293.1 800.73,-262.17 cw(c803.56,-265) 803.56,-261 840.54,-261 ccw(c840.54,-257) 843.36,-259.83 U2.N8@857.54,-245.65
MADDR5: U1.93 U2.N3 | length 643.2
  Top Layer w4: U1.93 731.29,-57.09 777.63,-103.43 ; 777.64,-103.44 ccw(c780.46,-100.6) 780.46,-104.6 841.11,-104.6 U2.N3
MADDR6: U1.86 U2.N7 | length 1452.5
  Top Layer w4: U1.86 327.98,-125.98 cw(c327.98,-129.98) 330.82,-127.17 388.3,-184.65 389.05,-184.65 ; 387.7,-183.3 389.05,-184.65 ; 838.1,-175.96 838.1,-192.25 ccw(c842.1,-192.25) 842.1,-196.25 850.1,-196.25 ccw(c850.1,-192.25) 854.1,-192.25 854.1,-170.35 cw(c858.1,-170.35) 858.13,-166.35 866.9,-166.35 cw(c866.9,-170.35) 870.9,-170.35 870.9,-200.8 U2.N7 ; 838.1,-175.93 ccw(c825.74,-176.02) 837.63,-172.63 ccw(c833.78,-173.73) 830.95,-170.9 818.07,-183.78 cw(c815.24,-180.95) 815.24,-184.95 784.15,-184.95 753.75,-215.35 745.16,-215.35 cw(c745.16,-211.35) 742.33,-208.52 756.87,-193.98 ccw(c754.04,-191.15) 756.86,-188.31 752.89,-184.34 ccw(c750.05,-187.15) 751.45,-183.41 cw(c758.1,-165.61) 751.24,-183.33 ccw(c749.8,-187.06) 746.97,-184.23 722.53,-208.67 cw(c719.7,-205.84) 715.7,-205.84 715.7,-190.03 ccw(c711.7,-190) 715.15,-187.98 ccw(c711.7,-190) 713.15,-186.27 711.7,-186 686,-186 ccw(c686,-193) 679,-193 679,-206.09 cw(c672,-206.09) 665,-206.09 665,-191.44 ccw(c658,-191.44) 651,-191.44 651,-212.8 cw(c644,-212.8) 637,-212.8 637,-191.44 ccw(c630,-191.44) 623,-191.44 623,-212.8 cw(c616,-212.8) 609,-212.8 609,-191.44 ccw(c602,-191.44) 595,-191.44 595,-212.8 cw(c588,-212.8) 581,-212.8 581,-191.44 ccw(c574,-191.44) 567,-191.44 567,-212.8 cw(c560,-212.8) 553,-212.8 553,-191.44 ccw(c546,-191.44) 539,-191.44 539,-212.8 cw(c532,-212.8) 525,-212.8 525,-191.44 ccw(c518,-191.44) 511,-191.44 511,-212.8 cw(c504,-212.8) 497,-212.8 497,-191.44 ccw(c490,-191.44) 483,-191.44 483,-212.8 cw(c476,-212.8) 469,-212.8 469,-191.44 ccw(c462,-191.44) 455,-191.44 455,-212.8 cw(c448,-212.8) 441,-212.8 441,-191.44 ccw(c434,-191.44) 427,-191.44 427,-212.8 cw(c420,-212.8) 413,-212.8 413,-193 ccw(c406,-193) 406,-186 392,-186 390.4,-186 390,-185.6 389.05,-184.65
MADDR7: U1.95 U2.P2 | length 591.5
  Top Layer w4: U1.95 787.89,-37.4 792.92,-42.43 812.54,-42.43 822.71,-52.6 U2.P2@826.3,-52.6
MADDR8: U1.84 U2.P8 | length 1449.5
  Top Layer w4: U1.84 284.21,-145.67 cw(c284.21,-149.67) 287.06,-146.86 329.95,-189.75 329.95,-247 332.39,-249.44 334.39,-251.44 ccw(c341.26,-241.66) 348.39,-251.25 cw(c355.39,-251.25) 362.39,-251.25 362.39,-304.64 ccw(c369.39,-304.64) 376.39,-304.64 376.39,-282.02 cw(c383.39,-282.02) 390.39,-282.02 390.39,-304.64 ccw(c397.39,-304.64) 404.39,-304.64 404.39,-282.02 cw(c411.39,-282.02) 418.39,-282.02 418.39,-304.64 ccw(c425.39,-304.64) 432.39,-304.64 432.39,-282.02 cw(c439.39,-282.02) 446.39,-282.02 446.39,-304.64 ccw(c453.39,-304.64) 460.39,-304.64 460.39,-282.02 cw(c467.39,-282.02) 474.39,-282.02 474.39,-304.64 ccw(c481.39,-304.64) 488.39,-304.64 488.39,-282.02 cw(c495.39,-282.02) 502.39,-282.02 502.39,-304.64 ccw(c509.39,-304.64) 516.39,-304.64 516.39,-282.02 cw(c523.39,-282.02) 530.39,-282.02 530.39,-304.64 ccw(c537.39,-304.64) 544.39,-304.64 544.39,-282.02 cw(c551.39,-282.02) 558.39,-282.02 558.39,-304.64 ccw(c565.39,-304.64) 572.39,-304.64 572.39,-282.02 cw(c579.39,-282.02) 586.39,-282.02 586.39,-304.64 ccw(c593.39,-304.64) 600.39,-304.64 600.39,-282.02 cw(c607.39,-282.02) 614.39,-282.02 614.39,-304.64 ccw(c621.39,-304.64) 628.39,-304.64 628.39,-282.02 cw(c635.39,-282.02) 642.39,-282.02 642.39,-304.64 ccw(c649.39,-304.64) 656.39,-304.64 656.39,-282.02 cw(c663.39,-282.02) 670.39,-282.02 670.39,-289.15 ccw(c677.39,-289.15) 684.39,-289.15 684.39,-282.02 cw(c691.39,-282.02) 691.39,-275.02 719.82,-275.02 722.65,-273.85 740.58,-255.92 742.58,-253.92 749.23,-247.27 cw(c752.06,-250.1) 752.06,-246.1 767.49,-246.1 ccw(c767.49,-242.1) 770.32,-244.93 782.67,-232.58 cw(c785.5,-235.41) 785.46,-231.41 ; 785.5,-231.41 811.1,-231.41 cw(c811.1,-235.41) 813.94,-232.59 U2.P8@825.9,-244.55
MADDR9: U1.94 U2.P3 | length 627.7
  Top Layer w4: U1.94 734.17,-47.24 758.53,-71.6 798.34,-71.6 812.54,-85.8 824.42,-85.8 U2.P3
MADDR10: U1.92 U2.M2 | length 736.7
  Top Layer w4: U1.92 691.08,-66.93 739.8,-115.65 855,-115.65 871.79,-98.86 871.79,-73.91 888.2,-57.5 U2.M2@888.2,-52.35
MADDR11: U1.85 U2.P7 | length 1450.1
  Top Layer w4: U1.85 307.93,-135.83 349.95,-177.85 349.95,-228.25 ccw(c353.95,-228.25) 353.05,-232.15 ccw(c353.95,-228.25) 353.95,-232.25 355.05,-232.25 ccw(c355.05,-225.25) 362.05,-225.25 362.05,-196.37 cw(c369.05,-196.37) 376.05,-196.37 376.05,-256.02 ccw(c383.05,-256.02) 390.05,-256.02 390.05,-230.69 cw(c397.05,-230.69) 404.05,-230.69 404.05,-256.02 ccw(c411.05,-256.02) 418.05,-256.02 418.05,-238.8 cw(c425.05,-238.8) 432.05,-238.8 432.05,-256.02 ccw(c439.05,-256.02) 446.05,-256.02 446.05,-238.8 cw(c453.05,-238.8) 460.05,-238.8 460.05,-256.02 ccw(c467.05,-256.02) 474.05,-256.02 474.05,-238.8 cw(c481.05,-238.8) 488.05,-238.8 488.05,-256.02 ccw(c495.05,-256.02) 502.05,-256.02 502.05,-238.8 cw(c509.05,-238.8) 516.05,-238.8 516.05,-256.02 ccw(c523.05,-256.02) 530.05,-256.02 530.05,-238.8 cw(c537.05,-238.8) 544.05,-238.8 544.05,-256.02 ccw(c551.05,-256.02) 558.05,-256.02 558.05,-238.8 cw(c565.05,-238.8) 572.05,-238.8 572.05,-256.02 ccw(c579.05,-256.02) 586.05,-256.02 586.05,-238.8 cw(c593.05,-238.8) 600.05,-238.8 600.05,-256.02 ccw(c607.05,-256.02) 614.05,-256.02 614.05,-238.8 cw(c621.05,-238.8) 628.05,-238.8 628.05,-256.02 ccw(c635.05,-256.02) 642.05,-256.02 642.05,-238.8 cw(c649.05,-238.8) 656.05,-238.8 656.05,-256.02 ccw(c663.05,-256.02) 670.05,-256.02 670.05,-232.1 cw(c677.05,-232.1) 684.05,-232.1 684.05,-256.02 ccw(c691.05,-256.02) 698.05,-256.02 698.05,-227.24 cw(c705.05,-227.24) 712.05,-227.24 712.05,-249.64 ccw(c719.05,-249.64) 726.05,-249.64 726.05,-239.25 cw(c733.05,-239.25) 733.05,-232.25 752.81,-232.25 ccw(c752.81,-228.25) 753.35,-232.21 ccw(c752.81,-228.25) 755.64,-231.08 788.47,-198.25 810.88,-198.25 U2.P7
MADDR12: U1.96 U2.R2
MADDR13: U1.83 U2.R8 | length 1449.4
  Top Layer w4: U1.83@241.35,-155.8 263.28,-155.8 297.71,-190.24 ; 298.35,-189.6 316.7,-207.95 316.7,-311 ccw(c320.7,-311) 320.7,-315 328.1,-315 ccw(c328.1,-311) 332.1,-311 332.1,-272.58 cw(c336.1,-272.58) 336.52,-268.61 ccw(c342.71,-210.56) 343.54,-268.93 cw(c343.6,-272.93) 347.6,-272.93 347.6,-313.39 ccw(c351.6,-313.39) 348.77,-316.22 357.35,-324.8 366.5,-324.8 ; 366.5,-324.95 375.39,-324.95 385.5,-324.95 cw(c385.5,-331.95) 392.5,-331.95 392.5,-335.4 ccw(c399.5,-335.4) 406.5,-335.4 406.5,-330.31 cw(c413.5,-330.31) 420.5,-330.31 420.5,-342.79 ccw(c427.5,-342.79) 434.5,-342.79 434.5,-330.33 cw(c441.5,-330.33) 448.5,-330.33 448.5,-342.79 ccw(c455.5,-342.79) 462.5,-342.79 462.5,-330.35 cw(c469.5,-330.35) 476.5,-330.35 476.5,-342.79 ccw(c483.5,-342.79) 490.5,-342.79 490.5,-330.37 cw(c497.5,-330.37) 504.5,-330.37 504.5,-342.79 ccw(c511.5,-342.79) 518.5,-342.79 518.5,-330.39 cw(c525.5,-330.39) 532.5,-330.39 532.5,-342.79 ccw(c539.5,-342.79) 546.5,-342.79 546.5,-330.42 cw(c553.5,-330.42) 560.5,-330.42 560.5,-342.79 ccw(c567.5,-342.79) 574.5,-342.79 574.5,-330.44 cw(c581.5,-330.44) 588.5,-330.44 588.5,-342.79 ccw(c595.5,-342.79) 602.5,-342.79 602.5,-330.46 cw(c609.5,-330.46) 616.5,-330.46 616.5,-342.79 ccw(c623.5,-342.79) 630.5,-342.79 630.5,-330.48 cw(c637.5,-330.48) 644.5,-330.48 644.5,-342.79 ccw(c651.5,-342.79) 658.5,-342.79 658.5,-328.91 cw(c665.5,-328.91) 672.5,-328.91 672.5,-342.79 ccw(c679.5,-342.79) 686.5,-342.79 686.5,-313.42 cw(c693.5,-313.42) 700.5,-313.42 700.5,-342.79 ccw(c707.5,-342.79) 714.5,-342.79 714.5,-294.02 cw(c721.5,-294.02) 728.5,-294.02 728.5,-342.79 ccw(c735.5,-342.79) 742.5,-342.79 742.5,-331.95 cw(c749.5,-331.95) 749.5,-324.95 750.4,-324.95 ccw(c750.4,-320.95) 751.5,-324.8 ccw(c750.4,-320.95) 754.4,-320.95 754.4,-283.81 cw(c758.4,-283.81) 755.57,-280.98 790.1,-246.45 cw(c792.93,-249.28) U2.R8@792.89,-245.28 ; U2.R8@792.93,-245.28 U2.R8
MDATA0: U1.71 U2.G8 | length 402.7
  Top Layer w4: U1.71 125.98,-389.68 148.38,-412.08 ; 148.39,-412.09 ccw(c151.21,-409.25) 151.21,-413.25 ; 986.49,-413.25 ccw(c986.49,-409.25) 989.32,-412.08 1032.6,-368.8 1032.6,-259.57 U2.G8
MDATA1: U1.107 U2.G2
MDATA2: U1.69 U2.H7 | length 652.3
  Top Layer w4: U1.69 106.3,-411.19 142.04,-446.93 ; 142.06,-446.94 ccw(c144.87,-444.1) 144.87,-448.1 ; U2.H7@1015.15,-212.45 1016.15,-211.45 1016.15,-184.3 1020.25,-180.2 1089.91,-180.2 1092.26,-182.54 1092.26,-379.04 1024.37,-446.93 cw(c1021.54,-444.1) 1021.54,-448.1
MDATA3: U1.105 U2.H3
MDATA4: U1.106 U2.H1
MDATA5: U1.73 U2.H9 | length 251.3
  Top Layer w4: U1.73 145.67,-363.67 179.98,-397.98 ccw(c182.79,-395.13) 182.67,-399.13 ; 1015.39,-328.46 U2.H9
MDATA6: U1.109 U2.F1
MDATA7: U1.70 U2.F9 | length 383.6
  Top Layer w4: U1.70 116.14,-404.74 137.53,-426.13 ; 137.54,-426.14 ccw(c140.36,-423.3) 140.36,-427.3 ; 993.09,-427.3 ccw(c993.09,-423.3) 995.92,-426.13 1078.38,-343.67 U2.F9
MDATA8: U1.66 U2.C8 | length 582.7
  Top Layer w4: U1.66 76.77,-445.82 130.28,-499.33 ; 130.29,-499.34 ccw(c133.11,-496.5) 133.11,-500.5 ; 1084.34,-500.5 ccw(c1084.34,-496.5) 1087.17,-499.33 1161.65,-424.85 1161.65,-331.85 1153.75,-323.95 1153.75,-295.77 1155.25,-294.27 1155.25,-262.9 U2.C8
MDATA9: U1.112 U2.C2
MDATA10: U1.68 U2.D7 | length 522.8
  Top Layer w4: U1.68 96.46,-414.07 143.51,-461.13 ccw(c146.34,-458.3) 146.34,-462.3 ; 1066.74,-462.3 ccw(c1066.74,-458.3) 1069.57,-461.13 1126.55,-404.15 1126.55,-228.61 U2.D7
MDATA11: U1.110 U2.D3
MDATA12: U1.111 U2.D1
MDATA13: U1.67 U2.D9 | length 524.8
  Top Layer w4: U1.67 86.61,-318.61 86.7,-318.7 86.7,-417.04 147.63,-477.98 ; 147.65,-477.99 ccw(c150.46,-475.15) 150.46,-479.15 ; 1072.94,-479.15 ccw(c1072.94,-475.15) 1075.77,-477.98 1143.9,-409.85 1143.9,-346.16 1141.38,-343.64 1141.38,-278.32 U2.D9@1142.75,-276.95
MDATA14: U1.114 U2.B1
MDATA15: U1.65 U2.B9 | length 1596.4
  Top Layer w4: U1.65 66.93,-462.07 ccw(c70.93,-462.07) 68.09,-464.89 121.63,-518.43 ccw(c124.46,-515.6) 124.46,-519.6 1109.69,-519.6 ccw(c1109.69,-515.6) 1112.52,-518.43 1203.2,-427.75 ccw(c1200.37,-424.92) 1204.37,-424.92 U2.B9
MISO: U1.26 U3.2
MOSI: R25.2 R26.2 U1.27 U3.5
NetC10_1: C10.1 C11.2 L3.1
NetC10_2: C10.2 L4.2
NetC11_1: C11.1 C17.2 L5.1 L8.2
NetC12_2: C12.2 L1.1 L4.1 U1.5 U1.6
NetC15_1: C15.1 L2.1 L7.1 U1.3 U1.4
NetC16_1: C16.1 C20.1 L8.1
NetC16_2: C16.2 L7.2
NetC17_1: C17.1 C18.1 L5.2 L6.1
NetC19_1: C19.1 L6.2 P1.2
NetC23_2: C23.2 U1.151 X1.3
NetD1_A: D1.A R23.1
NetD2_A: D2.A R24.1
NetL9_1: L9.1 U1.118 U1.119
NetR3_1: R3.1 U1.25
NetR7_2: R7.2 U1.62
NetR8_2: R8.2 U1.61
NetR9_2: R9.2 U1.137
NetR11_2: R11.2 U1.59
NetR12_2: R12.2 U1.39
NetR19_2: R19.2 U3.7
NetR20_1: R20.1 U3.3
NetR21_2: R21.2 R22.1 TC10.1
PERST_N: R35.2 R36.2 U1.135
PWM_CH0: U1.45
PWM_CH1: U1.46
REF_CLK0: U1.136
RXI0_N: U1.34
RXI0_P: U1.33
RXI1_N: U1.44
RXI1_P: U1.43
SD_CD: R10.2 U1.50
SD_CLK: U1.54
SD_CMD: U1.55
SD_D0: U1.52
SD_D1: U1.51
SD_D2: U1.56
SD_D3: U1.57
SD_WP: R6.2 U1.49
SOC_1.2VD_MT7688: C48.1 U1.131
SPI_CS1: R29.2 R31.2 U1.24
TXO0_N: U1.36
TXO0_P: U1.35
TXO1_N: U1.42
TXO1_P: U1.40
UART_RXD0: U1.31
UART_RXD1: U1.148
UART_RXD2: U1.47
UART_TXD0: R33.2 R34.2 U1.30
UART_TXD1: R30.2 R32.2 U1.147
UART_TXD2: U1.48
USB_D_N: C43.1 R8.1
USB_D_P: C42.1 R7.1
WF_SX_3V3_IN: C13.2 C14.2 R2.2 U1.154
WIFI_RESET: U1.139
WLED_N: D1.K U1.144
pads on no net: C28.1 U1.9 U1.11 U1.12 U1.37 U1.126 U1.127 U1.129 U1.130 U1.132 U1.133 U1.140 U1.141 U1.153 U2.A2 U2.A8 U2.E2 U2.E8 U2.R3 U2.R7

## Silkscreen, mask and mechanical layers (free items; w line width, h text height)
Mechanical 1:
  the board outline again, w0.39
Mechanical 13:
  lines w24: 260.95,-407.95 260.95,-414.05 790.5,-414.05 804.8,-399.75 804.8,-366.45 853.85,-317.4

## Text inside footprints (layer, text, board x,y; h text height)
TC1: Top Overlay "+" at 5480.12,-1793.88 h30 r90
TC2: Top Overlay "+" at 4130.12,-1363.88 h30 r90
TC3: Top Overlay "+" at 6200.12,-933.88 h30 r90
TC4: Top Overlay "+" at 5290.12,-933.88 h30 r90
TC5: Top Overlay "+" at 4600.12,-933.88 h30 r90
TC6: Top Overlay "+" at 3910.12,-933.88 h30 r90
TC7: Top Overlay "+" at 4140.12,-933.88 h30 r90
TC8: Top Overlay "+" at 3680.12,-933.88 h30 r90
TC9: Top Overlay "+" at 1670.8,-547.05 h30 r90
TC10: Top Overlay "+" at 3770.12,-503.88 h30 r90